# EAGLE board UTX_EE445M_FRONT_LIDAR_BOARD_1 (EAGLE 9.2.2)
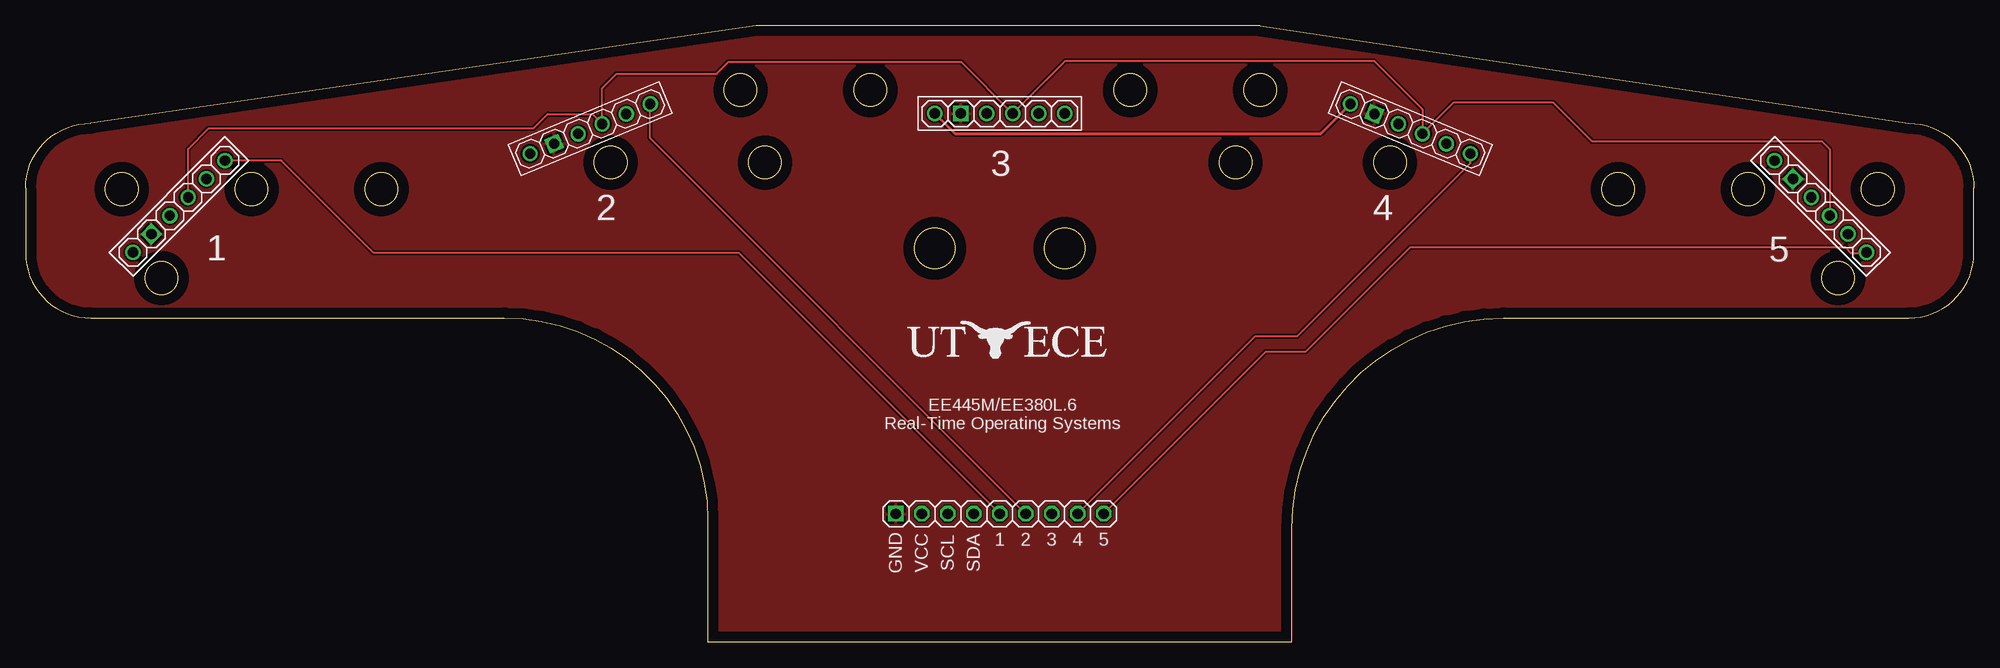
[diagram p0: board, top side]
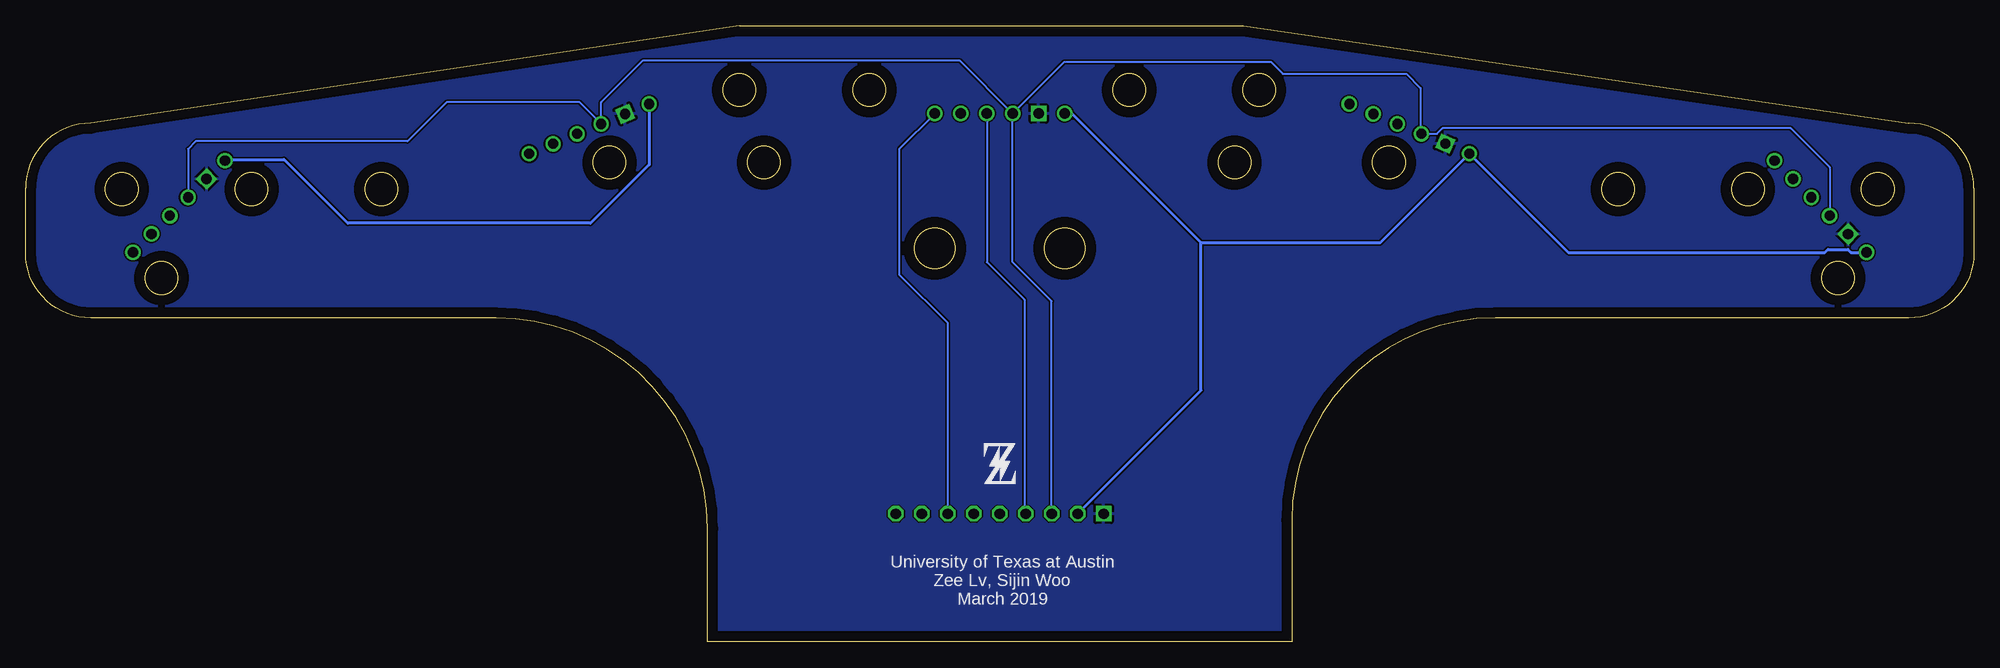
[diagram p1: board, bottom side, seen from below]

Size 190.5 x 60.3 mm. Coordinates in mm from the lower left corner, seen from the top.
Outline: 190.5,38.05 190.5,44.4 arc90 184.15,50.75 120.7,60.3 71.4,60.3 6.35,50.75 arc90 0,44.4 0,38.05 arc90 6.35,31.7 46.8,31.7 arc-90 66.7,11.9 66.7,0 123.8,0 123.8,11.1 arc-90 144.5,31.7 184.15,31.7 arc90 190.5,38.05
Outline: circle at 88.9,38.5 radius 2
Outline: circle at 101.6,38.5 radius 2
Outline: circle at 82.6,54 radius 1.6
Outline: circle at 108,54 radius 1.6
Outline: circle at 177.2,35.6 radius 1.6
Outline: circle at 13.3,35.6 radius 1.6
Outline: circle at 9.4,44.3 radius 1.6
Outline: circle at 34.8,44.3 radius 1.6
Outline: circle at 22.1,44.3 radius 1.6
Outline: circle at 120.7,54 radius 1.6
Outline: circle at 69.9,54 radius 1.6
Outline: circle at 118.3,46.9 radius 1.6
Outline: circle at 72.3,46.9 radius 1.6
Outline: circle at 133.4,46.9 radius 1.6
Outline: circle at 57.2,46.9 radius 1.6
Outline: circle at 181.1,44.3 radius 1.6
Outline: circle at 168.4,44.3 radius 1.6
Outline: circle at 155.7,44.3 radius 1.6
Copper layers (1*16): Top 0.035mm / dielectric 1.5mm / Bottom 0.035mm
Design rules "default": minimum track width 6mil, minimum drill 0.35mm, track to track 6mil, track to pad 6mil, pad to pad 6mil, via to via 6mil, smd to smd 6mil, copper to edge 40mil, drill to drill 6mil, minimum pad ring 10mil, minimum via ring 8mil, stop-mask expansion 4mil, vias tented up to drill 0mil, thermal gap 10mil

## Footprints (pad centres in the part's own frame; a part is rotated, then mirrored left to right if it is on the bottom)
UTX_EE445M_LIDAR_FRONT_BOARD_CONNECTOR_PTH = drill 1 square: GND -10.16,2.54 | drill 1 octagon: SCL -5.08,2.54; SDA -2.54,2.54; VCC -7.62,2.54; XSHUT1 0,2.54; XSHUT2 2.54,2.54; XSHUT3 5.08,2.54; XSHUT4 7.62,2.54; XSHUT5 10.16,2.54
LIDAR_VL53L0X_ATK_VERT = drill 1 square: GND -3.81,0 | drill 1: INT 3.81,0; SCL -1.27,0; SDA 1.27,0; VCC -6.35,0; XSH 6.35,0

## Placement (x,y rotation side)
U$1  UTX_EE445M_LIDAR_FRONT_BOARD_CONNECTOR_PTH  [UTX_EE445M_LIDAR_FRONT_BOARD_CONNECTOR_PTH]  95.25,10 0 top
U$2  LIDAR_VL53L0X_ATK_VERT  [LIDAR_VL53L0X_ATK_VERT]  15,42.6 45 top
U$3  LIDAR_VL53L0X_ATK_VERT  [LIDAR_VL53L0X_ATK_VERT]  55.2,50.2 22.5 top
U$4  LIDAR_VL53L0X_ATK_VERT  [LIDAR_VL53L0X_ATK_VERT]  95.25,51.7 0 top
U$5  LIDAR_VL53L0X_ATK_VERT  [LIDAR_VL53L0X_ATK_VERT]  135.4,50.2 337.5 top
U$6  LIDAR_VL53L0X_ATK_VERT  [LIDAR_VL53L0X_ATK_VERT]  175.5,42.6 315 top
U$7  [LOGO_UT_ECE_20X4]  85.78,27.46 0 top
U$8  [LOGO_Z_3X4]  96.77,15.44 0 bottom

## Library data of the parts
U$1-U$8 = Z

## Nets
GND: U$1.GND U$2.GND U$3.GND U$4.GND U$5.GND U$6.GND
N$1: U$3.INT
N$2: U$6.INT
N$3: U$4.INT
N$5: U$5.INT
N$13: U$2.INT
SCL: U$1.SCL U$2.SCL U$3.SCL U$4.SCL U$5.SCL U$6.SCL
SDA: U$1.SDA U$2.SDA U$3.SDA U$4.SDA U$5.SDA U$6.SDA
VCC: U$1.VCC U$2.VCC U$3.VCC U$4.VCC U$5.VCC U$6.VCC
XSHUT1: U$1.XSHUT1 U$2.XSH
XSHUT2: U$1.XSHUT2 U$3.XSH
XSHUT3: U$1.XSHUT3 U$4.XSH
XSHUT4: U$1.XSHUT4 U$5.XSH
XSHUT5: U$1.XSHUT5 U$6.XSH

## Tracks (layer width: path | path; a pad name or v marks a point on that pad's centre or on a via)
GND
  pour Bottom: 0,60.53 190.5,60.53 190.5,-0.05 0,-0.05
  pour Top: 0,60.53 190.5,60.53 190.5,-0.05 0,-0.05
SCL
  Bottom 0.203: U$1.SCL 90.17,33.35 93.98,37.16 U$4.SCL | U$4.SCL 88.92,56.76 68.74,56.76 67.56,55.58 55.5,55.58 54.1,54.18 54.1,49.79 U$3.SCL 52.49,49.71 51.95,50.26 17.92,50.26 14.1,46.43 U$2.SCL | U$4.SCL 99.13,56.85 130.18,56.85 134.23,52.79 U$5.SCL 136.32,52.78 149.35,52.78 153.16,48.97 173.86,48.97 174.6,48.23 U$6.SCL
SDA
  Top 0.203: U$2.SDA 15.9,48.23 17.91,50.24 49.66,50.24 51.05,51.64 55.42,51.64 U$3.SDA 56.37,54.16 57.78,55.58 67.56,55.58 68.74,56.76 91.46,56.76 U$4.SDA 101.67,56.85 131.83,56.85 136.57,52.1 U$5.SDA 139.64,52.78 149.35,52.78 153.16,48.97 175.64,48.97 176.4,48.21 U$6.SDA
  Bottom 0.203: U$4.SDA 96.52,37.16 92.84,33.48 92.84,12.67 U$1.SDA
VCC
  Top 0.305: U$4.VCC 90.87,49.73 126.64,49.73 U$5.VCC
  Bottom 0.305: U$1.VCC 75.56,24.61 75.56,39.07 | 75.56,39.07 88.2,51.7 U$4.VCC | 75.56,39.07 58.04,39.07 U$3.VCC 39.67,38.11 14.57,38.11 14.27,38.41 12.33,38.41 12.03,38.11 U$2.VCC | U$5.VCC 129.53,46.69 135.25,40.97 159,40.97 165.23,47.19 170.91,47.19 U$6.VCC
XSHUT1
  Top 0.203: U$1.XSHUT1 69.74,38.05 34.04,38.05 25,47.09 U$2.XSH
XSHUT2
  Top 0.203: U$1.XSHUT2 61.07,49.26 U$3.XSH
XSHUT3
  Bottom 0.203: U$1.XSHUT3 100.33,31.19 105.03,35.89 105.03,48.27 U$4.XSH
XSHUT4
  Top 0.203: U$1.XSHUT4 120.25,29.92 124.33,29.92 141.27,46.86 U$5.XSH
XSHUT5
  Top 0.203: U$1.XSHUT5 121.27,28.4 125.17,28.4 135.38,38.61 177.91,38.61 178.47,38.05 179.93,38.05 U$6.XSH

## Text on the board
tPlace: 3 | 2 | 4 | 1 | 5 | EE445M/EE380L.6 / Real-Time Operating Systems
bPlace: University of Texas at Austin / Zee Lv, Sijin Woo / March 2019